# Altium PCB LM_001_Rev_C.PcbDoc (part 2 of 2)
Units mm, origin at the board's own origin, x right, y up, seen from the top; angles counter-clockwise.
Board outline 67 x 180 mm, 4 copper layers (Top Layer, +5V, Signal Layer 1, Bottom Layer), stack 0.778 mm thick; 103 components, 93 nets, 340 pads, 85 vias.
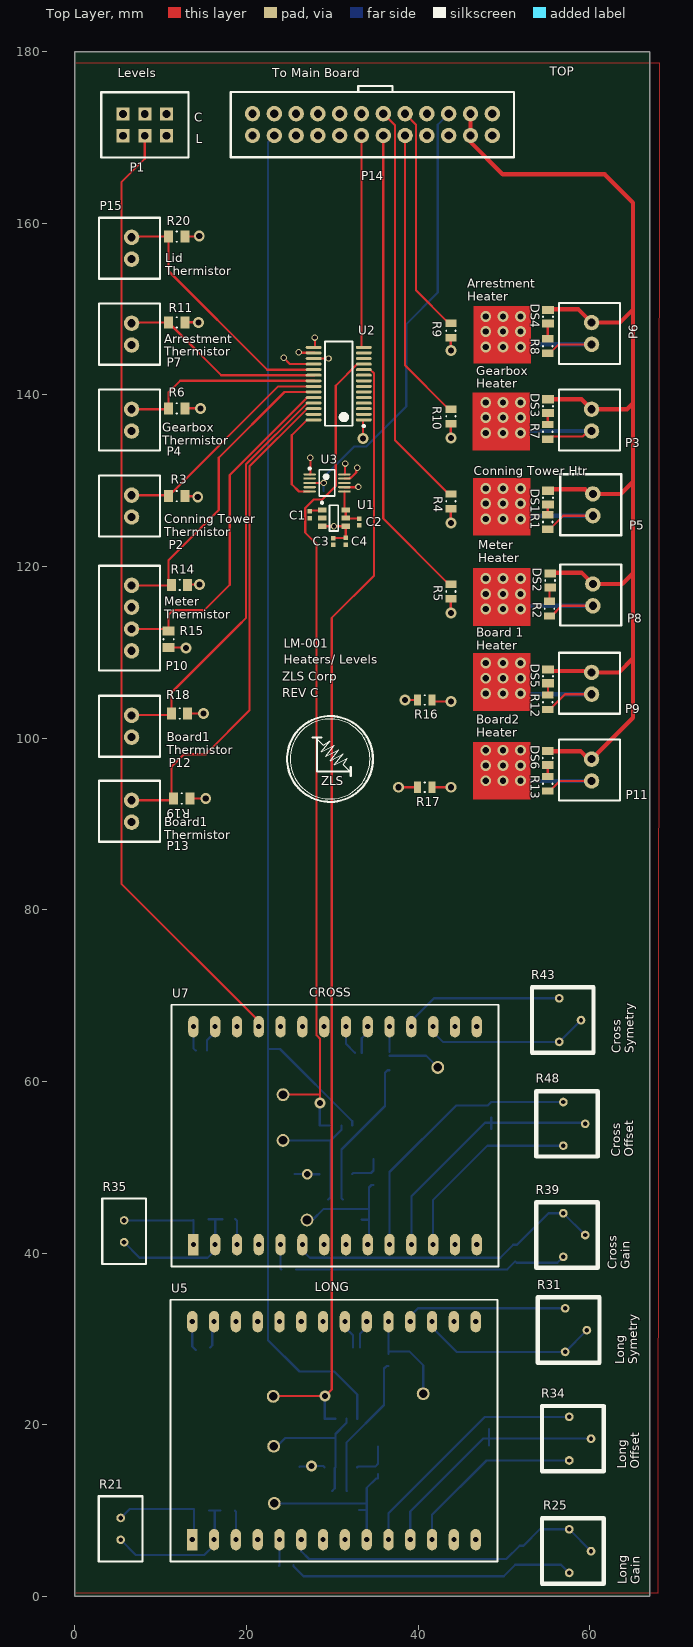
[diagram p0: Top Layer view]

## Via types
v1: diameter 1.27, hole 0.711, Top Layer to Bottom Layer, 75 vias
v2: diameter 0.75, hole 0.5, Top Layer to Bottom Layer, 10 vias

## Nets (pads, with @x,y where several pads share a name; then routed paths per layer and width w, separated by ;. In a path a pad name is that pad's centre, name@x,y a point inside that pad or via, vN(x,y) a via of type N, cw(c..) or ccw(c..) an arc to the next point about the centre after c; other vN are vias at no path point) (continued)
NetR35_2: (continued)
  Bottom Layer w0.254: R35.2 13.74,43.8 13.798,43.858 U7.1
NetR37_2: R37.2 U7.3 | length 3.1
  Bottom Layer w0.254: R37.2@18.648,43.984 18.878,43.754 U7.3
NetR38_1: R38.1 TP7.1 U6.3 U6.7 | length 14.8
  Bottom Layer w0.254: TP7.1 29.744,53.122 29.782,53.084 ; R38.1 29.782,46.504 U6.7 29.782,53.084 ; U6.3 31.052,54.354 29.782,53.084
NetR38_2: R38.2 R44.1 U6.6 | length 17.6
  Bottom Layer w0.254: R38.2 31.052,46.402 31.052,52.071 36.117,57.136 36.117,60.991 36.415,61.289 R44.1
NetR39_1: R39.1 R39.2 R41.2 U7.6 | length 37.2
  Bottom Layer w0.254: U7.6 26.498,40.334 27.375,39.457 49.558,39.457 51.068,40.967 51.518,40.967 55.189,44.638 R39.1 R39.2
NetR39_3: R39.3 R40.1 R41.1 | length 31.9
  Bottom Layer w0.254: R40.1 50.38,38.1 R41.1 51.474,38.862 56.213,38.862 R39.3
NetR40_2: R40.2 U7.5 | length 2.9
  Bottom Layer w0.254: U7.5 23.958,38.184 R40.2
NetR42_1: R42.1 R45.1 R48.2 U7.11 | length 30.8
  Bottom Layer w0.254: U7.11 39.198,46.595 47.782,55.179 48.514,55.179 ; R45.1 48.514,55.179 ; R42.1 48.514,55.179 ; R48.2@59.449,55.179 48.514,55.179
NetR42_2: R42.2 R48.1 U7.10 | length 32.1
  Bottom Layer w0.254: U7.10 36.658,49.437 44.415,57.194 48.116,57.194 48.514,57.592 56.836,57.592 R48.1@56.909,57.664
NetR43_1: R43.1 U7.18 | length 19
  Bottom Layer w0.254: U7.18 39.198,67.034 41.847,69.682 56.473,69.682 R43.1@56.477,69.679
NetR43_2: R43.2 R43.3 U7.17 | length 19.4
  Bottom Layer w0.254: U7.17 41.738,65.734 42.87,64.602 56.418,64.602 56.422,64.599 R43.2
NetR45_2: R45.2 R48.3 U7.12 | length 23
  Bottom Layer w0.254: U7.12 41.738,46.193 48.057,52.512 56.836,52.512 R48.3@56.909,52.584
NetR46_1: R46.1 R47.1 U6.5 | length 4
  Bottom Layer w0.254: U6.5 32.447,49.33 34.487,49.33 R46.1 R47.1
NetTP2_1: TP2.1 U2.10 U4.1 U4.2 | length 133
  Top Layer w0.254: TP2.1 23.127,23.327 v1(29.147,23.327) 29.915,24.096 29.915,114.012 34.861,118.958 34.861,142.48 34.409,142.932 U2.10@33.559,142.932
  Bottom Layer w0.254: v1(29.147,23.327) 29.115,23.296 29.115,20.719 U4.1 U4.2
NetTP6_1: TP6.1 U2.11 U6.1 U6.2 | length 98.8
  Top Layer w0.254: TP6.1 28.537,58.456 ; v1(28.537,57.465) 28.537,58.456 ; U2.11@33.559,143.582 32.909,143.582 30.391,141.064 30.391,129.373 28.816,127.798 27.818,127.798 26.831,126.811 26.831,123.941 28.161,122.611 28.161,65.371 28.537,64.995 28.537,58.456
  Bottom Layer w0.254: v1(28.537,57.465) 28.524,57.452 28.524,54.867 U6.1 U6.2
SPI0_MISO: P14.9 U3.1 | length 40.9
  Top Layer w0.254: U3.1 27.43,130.736 27.432,130.738 v2(27.432,132.671)
  Signal Layer 1 w0.254: v2(27.432,132.671) 30.848,136.086 30.848,169.994 P14.9@30.758,170.084
SPI0_SCLK: P14.10 U3.10 | length 42.9
  Top Layer w0.254: U3.10 31.481,130.736 31.483,130.738 v2(31.483,131.989)
  Signal Layer 1 w0.254: P14.10@30.758,172.624 30.98,172.624 32.118,171.486 32.118,132.624 v2(31.483,131.989)
Thermistor_CS0: P14.12 U3.9 | length 44.8
  Top Layer w0.254: U3.9 31.989,130.236 32.087,130.334 32.16,130.334 32.785,130.96 32.785,131.411 v2(32.88,131.506)
  Signal Layer 1 w0.254: v2(32.88,131.506) 34.658,133.284 34.658,171.486 33.52,172.624 P14.12@33.298,172.624
VR_REF_Cross: C13.1 R46.2 TP8.1 U7.9 | length 15.8
  Bottom Layer w0.254: TP8.1 27.673,43.851 28.943,45.121 34.262,45.121 ; C13.1@33.407,43.901 33.433,43.876 C13.1@34.262,43.876 ; U7.9@34.077,41.128 34.262,41.313 C13.1@34.262,43.876 ; R46.2 34.56,47.928 34.262,47.63 34.262,45.121 ; C13.1@34.262,43.876 34.262,45.121
VR_REF_Long: C10.1 R29.2 TP4.1 U5.9 | length 20
  Bottom Layer w0.254: TP4.1 33.993,10.831 ; C10.1@33.103,10.069 33.968,10.069 33.993,10.094 ; U5.9@33.961,6.577 U5.9 33.993,10.094 ; 35.293,14.248 R29.2 35.068,13.714 33.993,12.639 33.993,10.831 ; 33.993,10.094 33.993,10.831
pads on no net: P14.4 P14.5 U2.2 U2.3 U2.4 U2.5 U2.6 U2.7 U2.8 U2.9 U2.13 U5.4 U5.8 U5.13 U5.14 U5.15 U5.16 U5.23 U5.26 U7.4 U7.8 U7.13 U7.14 U7.15 U7.16 U7.23 U7.26

## Polygon pours and split planes (outlines as drawn)
GND on Top Layer "Top_GND" (solid, shelved, pour order 1): -0.01,178.684 68.098,178.684 67.898,0.356 -0.01,0.356
GND on Bottom Layer "Bottom_GND" (solid, shelved, pour order 0): -0.01,-0.016 68.098,-0.016 68.098,178.684 -0.01,178.684
GND on Signal Layer 1 "Top_GND" (solid, shelved, pour order 3): -0.165,179.298 67.943,179.298 67.943,0.598 -0.165,0.598
+5 on +5V (split plane): 66.49,179.49 66.49,0.51 0.51,0.51 0.51,179.49

## Other copper
Top Layer:
  rectangle net "Board1 Htr Out": 46.393,103.185 53.099,109.891
  rectangle net "Board2 Htr Out": 46.393,92.822 53.099,99.527
  rectangle net METER_HTR_OUT: 46.368,113.091 53.073,119.797
  rectangle net "Conning Tower Htr Out": 46.368,123.581 53.073,130.287
  rectangle net "Gearbox Htr Out": 46.342,133.538 53.048,140.244
  rectangle net "Arrestment Htr Out": 46.444,143.647 53.15,150.353

## Silkscreen, mask and mechanical layers (free items; w line width, h text height)
Top Overlay:
  circle w0.1: c29.722,97.567 r4.663
  circle w0.254: c29.722,97.567 r5
  lines w0.127: 28.198,99.929 28.96,99.167 29.722,99.675 28.706,98.405 30.23,99.167 29.214,97.897 30.738,98.659 29.722,97.389 31.246,98.151 30.23,96.881 31.754,97.643 31.246,96.881 32.008,96.119
  lines w0.254: 27.69,100.056 28.706,100.056 ; 28.198,99.929 28.198,96.119 32.008,96.119 ; 32.135,95.611 32.135,96.627 ; 33,175.311 33,176 37,176 37,175.336
  text "TOP" at 55.317,177.152 h1
  text "Levels" at 5,177 h1
  text "To Main Board" at 23,177 h1
  text "C" at 13.907,171.841 h1
  text "L" at 14.059,169.301 h1
  text "Lid / Thermistor" at 10.528,153.96 h1
  text "Arrestment / Heater" at 45.72,150.959 h1
  text "Arrestment / Thermistor" at 10.414,144.526 h1
  text "Gearbox / Heater" at 46.736,140.799 h1
  text "Gearbox / Thermistor" at 10.16,134.195 h1
  text "Conning Tower Htr" at 46.482,130.639 h1
  text "Conning Tower / Thermistor" at 10.414,123.527 h1
  text "Meter / Heater" at 46.99,120.479 h1
  text "Meter / Thermistor" at 10.401,113.929 h1
  text "LM-001" at 24.308,110.541 h1
  text "Board 1 / Heater" at 46.736,110.319 h1
  text "Heaters/ Levels" at 24.308,108.636 h1
  text "ZLS Corp" at 24.13,106.68 h1
  text "REV C" at 24.13,104.775 h1
  text "Board2 / Heater" at 46.736,100.159 h1
  text "Board1 / Thermistor" at 10.668,98.127 h1
  text "ZLS" at 28.706,94.519 h1
  text "Board1 / Thermistor" at 10.414,88.221 h1
  text "CROSS" at 27.305,69.85 h1
  text "Cross / Symetry" at 65.088,63.256 h1 r90
  text "Cross / Offset" at 65.037,51.191 h1 r90
  text "Cross / Gain" at 64.63,38.11 h1 r90
  text "LONG" at 27.94,35.56 h1
  text "Long / Symetry" at 65.494,27.036 h1 r90
  text "Long / Offset" at 65.748,14.895 h1 r90
  text "Long / Gain" at 65.799,1.433 h1 r90

## Dimensions
67,0 to 67,180 on Mechanical 13
0,0 to 67,0 on Mechanical 13
0,180 to 67,180 on Mechanical 13